# EAGLE board woolston_adsr (EAGLE 7.2.0)
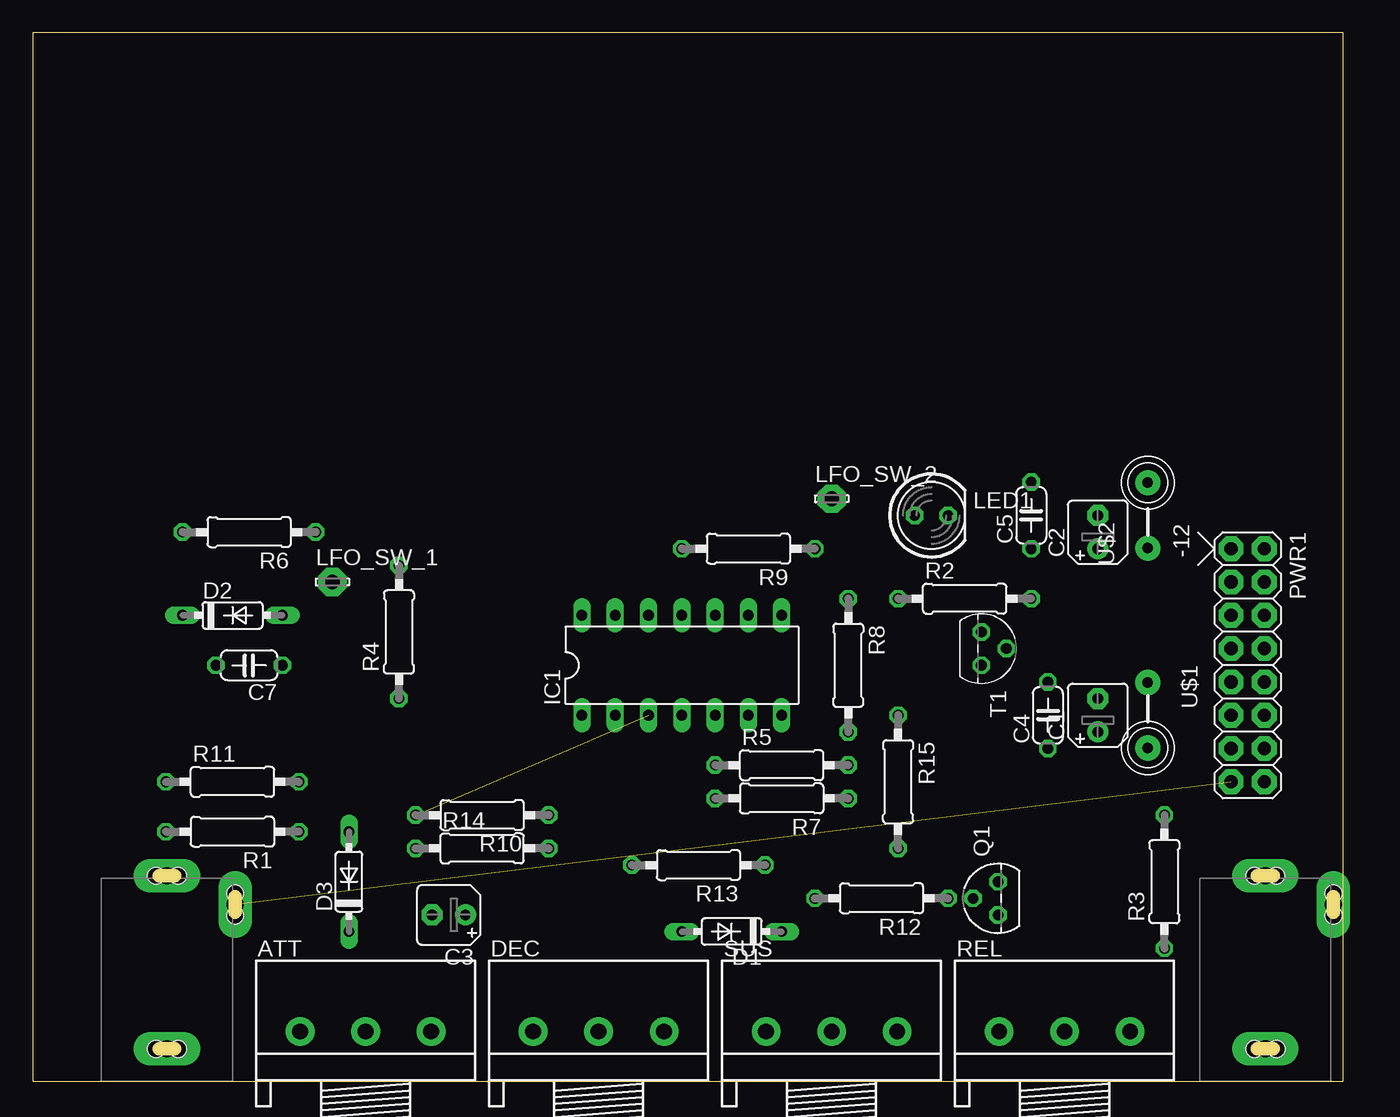
[diagram p0: board, top side]
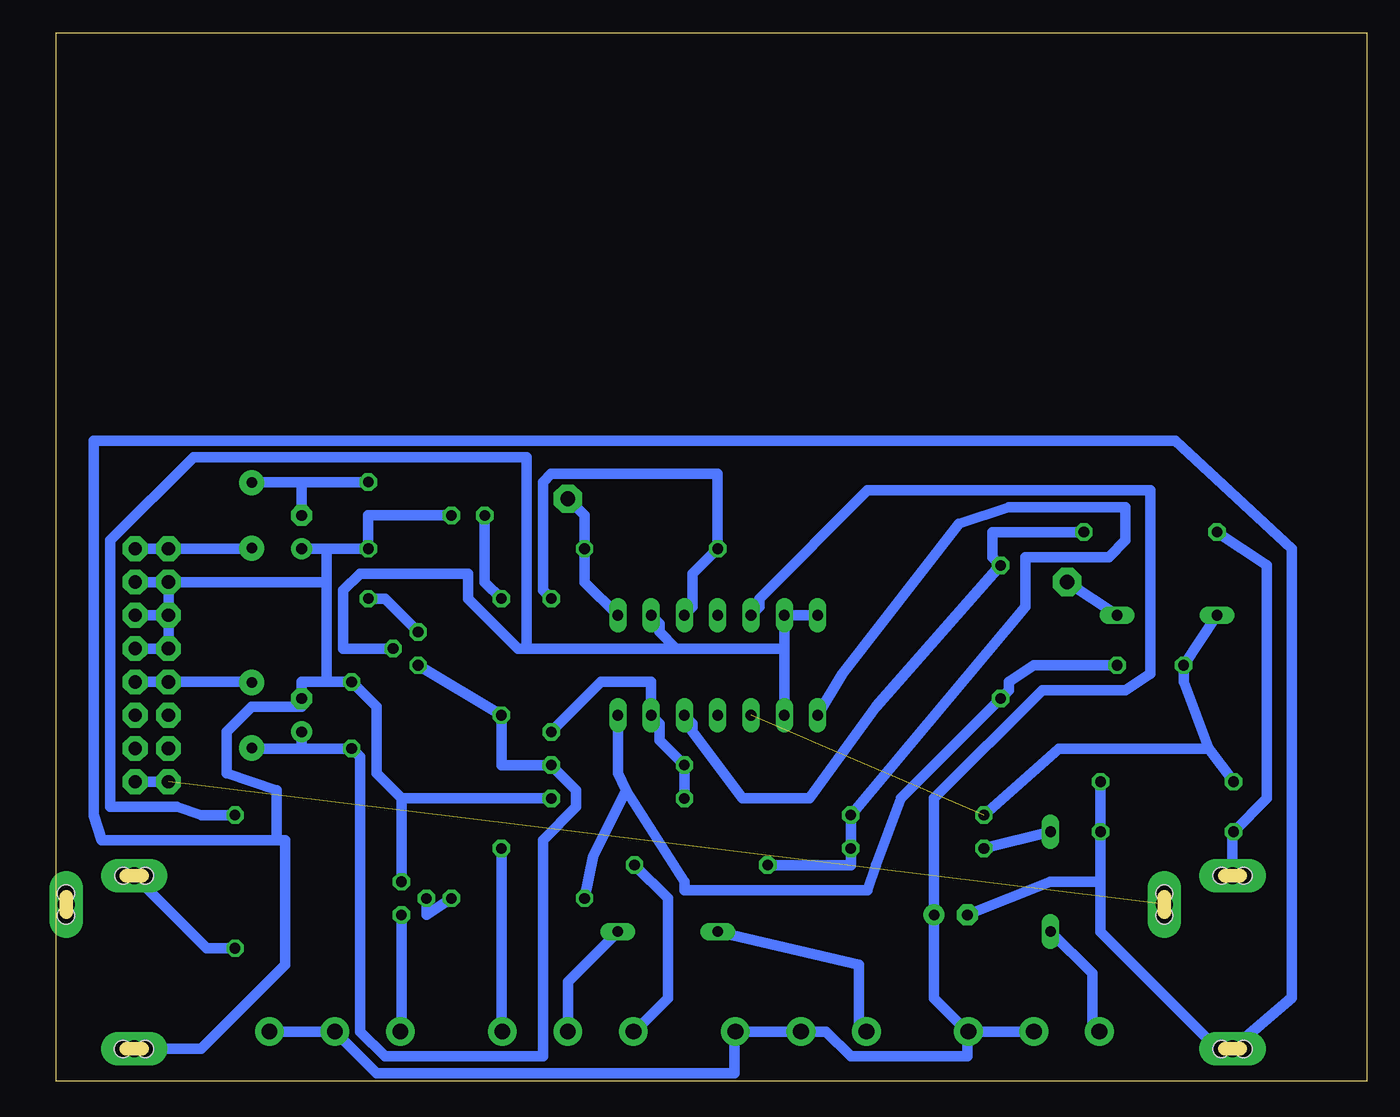
[diagram p1: board, bottom side, seen from below]

Size 100 x 80 mm. Coordinates in mm from the lower left corner, seen from the top.
Outline: 0,0 100,0 100,80 0,80 0,0
Copper layers (1*16): Top 0.035mm / dielectric 1.5mm / Bottom 0.035mm
Design rules "default *": minimum track width 32mil, minimum drill 31mil, track to track 16mil, track to pad 16mil, pad to pad 16mil, via to via 16mil, smd to smd 8mil, copper to edge 0mil, drill to drill 16mil, minimum pad ring 10mil, minimum via ring 8mil, stop-mask expansion 4mil, vias tented up to drill 0mil, thermal gap 10mil

## Footprints (pad centres in the part's own frame; a part is rotated, then mirrored left to right if it is on the bottom)
3RP/1610N = drill 1.2 pad 2.184: 1 -5,0; 2 0,0; 3 5,0
B45181A = drill 0.813 pad 1.6: + -1.27,0 | drill 0.813 pad 1.6 octagon: - 1.27,0
C050-024X044 = drill 0.813 octagon: 1 -2.54,0; 2 2.54,0
DO35-7 = drill 0.813 long: A 3.81,0; C -3.81,0
ERTHENVAR-JACK-90DEG = drill 1.3 pad 2.54 long: P$1 5,-2.5; P$2 -0.2,-13.5; P$3 5,-15.7 | hole 1.3: 5.842,-2.489; 4.14,-2.489; -0.203,-12.649; -0.203,-14.351; 5.842,-15.697; 4.166,-15.697
DIL14 = drill 0.813 long: 1 -7.62,-3.81; 2 -5.08,-3.81; 3 -2.54,-3.81; 4 0,-3.81; 5 2.54,-3.81; 6 5.08,-3.81; 7 7.62,-3.81; 8 7.62,3.81; 9 5.08,3.81; 10 2.54,3.81; 11 0,3.81; 12 -2.54,3.81; 13 -5.08,3.81; 14 -7.62,3.81
LED5MM = drill 0.813 octagon: A -1.27,0; K 1.27,0
LSP11 = drill 1.118 pad 2.159 octagon: MP 0,0
POWER_16 = drill 1.016 pad 1.88 octagon: 1 -6.35,-1.27; 2 -6.35,1.27; 3 -3.81,-1.27; 4 -3.81,1.27; 5 -1.27,-1.27; 6 -1.27,1.27; 7 1.27,-1.27; 8 1.27,1.27; 9 3.81,-1.27; 10 3.81,1.27; 11 6.35,-1.27; 12 6.35,1.27; 13 8.89,-1.27; 14 8.89,1.27; 15 11.43,-1.27; 16 11.43,1.27
TO92 = drill 0.813 octagon: 1 1.27,0; 2 0,1.905; 3 -1.27,0
0207/10 = drill 0.813 octagon: 1 -5.08,0; 2 5.08,0
FB = drill 0.8 pad 1.93: P$1 -2.5,0; P$2 2.5,0

## Placement (x,y rotation side)
ATT  1M log  [3RP/1610N]  25.4,3.81 0 top
C1  10u  [B45181A]  81.28,27.94 90 top
C2  10u  [B45181A]  81.28,41.91 90 top
C3  10u  [B45181A]  31.75,12.7 180 top
C4  100n  [C050-024X044]  77.47,27.94 90 top
C5  100n  [C050-024X044]  76.2,43.18 90 top
C7  10n  [C050-024X044]  16.51,31.75 180 top
D1  1N4148DO35-7  [DO35-7]  53.34,11.43 180 top
D2  1N4148DO35-7  [DO35-7]  15.24,35.56 0 top
D3  1N4148DO35-7  [DO35-7]  24.13,15.24 90 top
DEC  1M log  [3RP/1610N]  43.18,3.81 0 top
GATE  AUDIO-JACK  [ERTHENVAR-JACK-90DEG]  15.24,0 180 top
IC1  TL074P  [DIL14]  49.53,31.75 0 top
LED1  [LED5MM]  68.58,43.18 0 top
LFO_SW_1  LSP11  [LSP11]  22.86,38.1 0 top
LFO_SW_2  LSP11  [LSP11]  60.96,44.45 0 top
OUT  AUDIO-JACK  [ERTHENVAR-JACK-90DEG]  99.06,0 180 top
PWR1  POWER  [POWER_16]  92.71,34.29 270 top
Q1  2N3906  [TO92]  73.66,13.97 90 top
R1  22k  [0207/10]  15.24,19.05 180 top
R2  1k  [0207/10]  71.12,36.83 0 top
R3  1k  [0207/10]  86.36,15.24 90 top
R4  1M  [0207/10]  27.94,34.29 90 top
R5  10k  [0207/10]  57.15,24.13 0 top
R6  1k  [0207/10]  16.51,41.91 180 top
R7  1k  [0207/10]  57.15,21.59 180 top
R8  10k  [0207/10]  62.23,31.75 270 top
R9  1M  [0207/10]  54.61,40.64 180 top
R10  390k  [0207/10]  34.29,20.32 180 top
R11  1M  [0207/10]  15.24,22.86 0 top
R12  33k  [0207/10]  64.77,13.97 180 top
R13  10k  [0207/10]  50.8,16.51 180 top
R14  1k  [0207/10]  34.29,17.78 0 top
R15  4k7  [0207/10]  66.04,22.86 270 top
REL  500k  [3RP/1610N]  78.74,3.81 0 top
SUS  10k  [3RP/1610N]  60.96,3.81 0 top
T1  2N3904  [TO92]  72.39,33.02 270 top
U$1  FB  [FB]  85.09,27.94 270 top
U$2  FB  [FB]  85.09,43.18 90 top

## Library data of the parts
ATT DEC REL SUS = pot
C1-C5 C7 R1-R15 = rcl
D1-D3 = diode
GATE OUT = erthenvar
IC1 = linear
LED1 = led
LFO_SW_1 LFO_SW_2 = solpad
PWR1 = eurorack
Q1 = transistor-pnp
T1 = transistor
U$1 U$2 = adafruit

## Nets
+12V: C1.+ C4.1 R5.2 R15.1 T1.1 U$1.P$2
-12V: C2.- C5.2 U$2.P$2
GND: C1.- C2.+ C3.- C4.2 C5.1 GATE.P$1 LED1.K OUT.P$1 PWR1.3 PWR1.4 PWR1.5 PWR1.6 PWR1.7 PWR1.8 Q1.1 R1.1 R7.1 R11.2
N$1: PWR1.9 PWR1.10 U$1.P$1
N$2: PWR1.1 PWR1.2 U$2.P$1
N$3: Q1.3 REL.1
N$4: C7.1 IC1.7 R4.1 R12.2
N$5: R2.2 T1.3
N$6: IC1.5 R4.2 R6.1
N$7: IC1.6 R5.1 R7.2 R8.2
N$8: LED1.A R2.1
N$9: D2.A LFO_SW_1.MP
N$10: IC1.10 R8.1 R9.2
N$11: Q1.2 R12.1
N$12: GATE.P$2 PWR1.15 PWR1.16
N$13: IC1.8 LFO_SW_2.MP R9.1
N$14: GATE.P$3 R1.2 R6.2
N$15: OUT.P$3 R3.1
N$16: R13.1 SUS.1
N$18: C7.2 D2.C IC1.3 R10.2 R11.1
N$19: IC1.2 IC1.9 IC1.13 IC1.14 R3.2 T1.2
N$20: IC1.1 R10.1 R13.2 R14.2
N$21: D3.A R14.1
N$22: R15.2 SUS.3
N$23: ATT.1 D3.C
N$24: D1.A DEC.1
N$25: D1.C SUS.2
N$26: ATT.2 ATT.3 C3.+ DEC.2 DEC.3 IC1.12 REL.2 REL.3
V+: IC1.4
V-: IC1.11

## Tracks (layer width: path | path; a pad name or v marks a point on that pad's centre or on a via)
+12V
  Bottom 0.813: 81.28,25.4 C4.1 76.83,24.77 76.83,3.81 74.93,1.91 62.87,1.91 62.87,18.41 60.33,20.95 60.33,22.23 R5.2 66.04,24.13 R15.1 T1.1 | C1.+ 81.28,25.4 | 81.28,25.4 85.09,25.4 U$1.P$2
-12V
  Bottom 0.813: 81.28,45.72 C5.2 | C2.- 81.28,45.72 | 81.28,45.72 85.09,45.72 U$2.P$2
GND
  Bottom 0.813: R11.2 R1.1 20.32,15.24 | C3.- 24.13,15.24 20.32,15.24 | 73.66,21.59 R7.1 | Q1.1 73.66,21.59 | PWR1.4 PWR1.3 | PWR1.5 PWR1.7 PWR1.8 | PWR1.5 PWR1.6 | PWR1.5 PWR1.3 | 79.38,30.48 81.28,30.48 C1.- 81.28,28.57 85.09,28.57 87,26.67 87,23.5 83.19,22.23 83.19,18.41 | 79.38,30.48 C4.2 75.56,28.57 75.56,23.5 73.66,21.59 | LED1.K 76.2,43.18 C5.1 79.38,40.64 | 79.38,40.64 C2.+ | 79.38,40.64 79.38,38.1 | 79.38,38.1 79.38,30.48 | 79.38,38.1 PWR1.3 | 83.19,18.41 82.55,18.41 82.55,8.89 88.94,2.5 OUT.P$1 | 83.19,18.41 96.52,18.41 97.16,20.32 97.16,48.9 14.61,48.9 5.71,40.64 5.71,6.39 GATE.P$1 10.28,2.54 11.43,2.54 20.32,11.43 20.32,15.24
N$1
  Bottom 0.813: PWR1.10 PWR1.9 85.09,30.48 U$1.P$1
N$2
  Bottom 0.813: PWR1.2 PWR1.1 85.09,40.64 U$2.P$1
N$3
  Bottom 0.813: Q1.3 73.66,3.81 REL.1
N$4
  Bottom 0.813: C7.1 25.4,31.75 27.3,30.48 27.3,29.84 R4.1 35.56,21.59 37.47,16.51 38.1,14.61 52.07,14.61 52.07,15.24 56.52,22.23 | IC1.7 57.15,23.5 56.52,22.23 | 56.52,22.23 59.05,17.14 R12.2
N$5
  Bottom 0.813: T1.3 74.93,36.83 R2.2
N$6
  Bottom 0.813: R6.1 28.57,41.91 28.57,40.01 R4.2 37.47,28.57 42.55,21.59 47.62,21.59 51.44,26.67 51.44,27.3 IC1.5
N$7
  Bottom 0.813: R7.2 R5.1 53.98,26.04 53.98,27.3 IC1.6 54.61,30.48 58.42,30.48 R8.2
N$8
  Bottom 0.813: R2.1 67.31,38.1 LED1.A
N$9
  Bottom 0.813: LFO_SW_1.MP D2.A
N$10
  Bottom 0.813: IC1.10 51.44,36.2 51.44,38.73 R9.2 49.53,46.35 62.23,46.35 62.87,45.72 62.87,37.47 R8.1
N$11
  Bottom 0.813: R12.1 71.75,12.7 Q1.2
N$12  (1 unrouted)
  Bottom 0.813: PWR1.16 PWR1.15
N$13
  Bottom 0.813: IC1.8 59.69,38.1 R9.1 59.69,43.18 LFO_SW_2.MP
N$14
  Bottom 0.813: R6.2 7.62,39.37 7.62,21.59 R1.2 10.24,18.97 GATE.P$3
N$15
  Bottom 0.813: R3.1 88.52,10.16 OUT.P$3
N$16
  Bottom 0.813: R13.1 53.34,13.97 53.34,6.35 55.88,3.81 SUS.1
N$18  (1 unrouted)
  Bottom 0.813: 12.06,25.4 13.97,30.48 C7.2 D2.C | 12.06,25.4 R11.1 | R10.2 23.5,25.4 12.06,25.4
N$19
  Bottom 0.813: 44.45,33.02 IC1.13 IC1.14 | 44.45,33.02 IC1.2 | IC1.9 53.98,34.92 53.98,34.29 52.7,33.02 | 44.45,33.02 52.7,33.02 | T1.2 78.11,33.02 78.11,37.47 76.83,38.73 68.58,38.73 68.58,36.83 64.77,33.02 64.14,33.02 | 52.7,33.02 64.14,33.02 | R3.2 88.9,20.32 90.81,20.95 95.89,20.95 95.89,41.27 89.53,47.62 64.14,47.62 64.14,33.02
N$20
  Bottom 0.813: R13.2 39.37,16.51 R14.2 R10.1 26.04,36.2 26.04,40.01 19.68,40.01 18.41,41.27 18.41,43.81 27.3,43.81 31.11,42.55 40.01,31.11 IC1.1
N$21
  Bottom 0.813: R14.1 D3.A
N$22
  Bottom 0.813: R15.2 66.04,3.81 SUS.3
N$23
  Bottom 0.813: D3.C 20.95,8.26 20.95,3.81 ATT.1
N$24
  Bottom 0.813: D1.A 38.73,8.89 38.73,3.81 DEC.1
N$25
  Bottom 0.813: D1.C 60.96,7.62 SUS.2
N$26
  Bottom 0.813: REL.3 REL.2 75.56,0.64 48.26,0.64 48.26,3.81 DEC.3 DEC.2 41.27,3.81 39.37,1.91 30.48,1.91 30.48,3.81 | ATT.2 ATT.3 30.48,3.81 | IC1.12 46.35,36.2 46.35,36.83 38.1,45.09 16.51,45.09 16.51,31.11 18.41,29.84 24.77,29.84 33.02,21.59 C3.+ 33.02,6.35 30.48,3.81